# Altium PCB SMART_WATCH.PcbDoc (part 2 of 4)
Units mil, origin at the board's own origin, x right, y up, seen from the top; angles counter-clockwise.
Board outline 2401.57 x 2362.2 mil, 2 copper layers (Top Layer, Bottom Layer); 98 components, 64 nets, 344 pads, 272 vias.
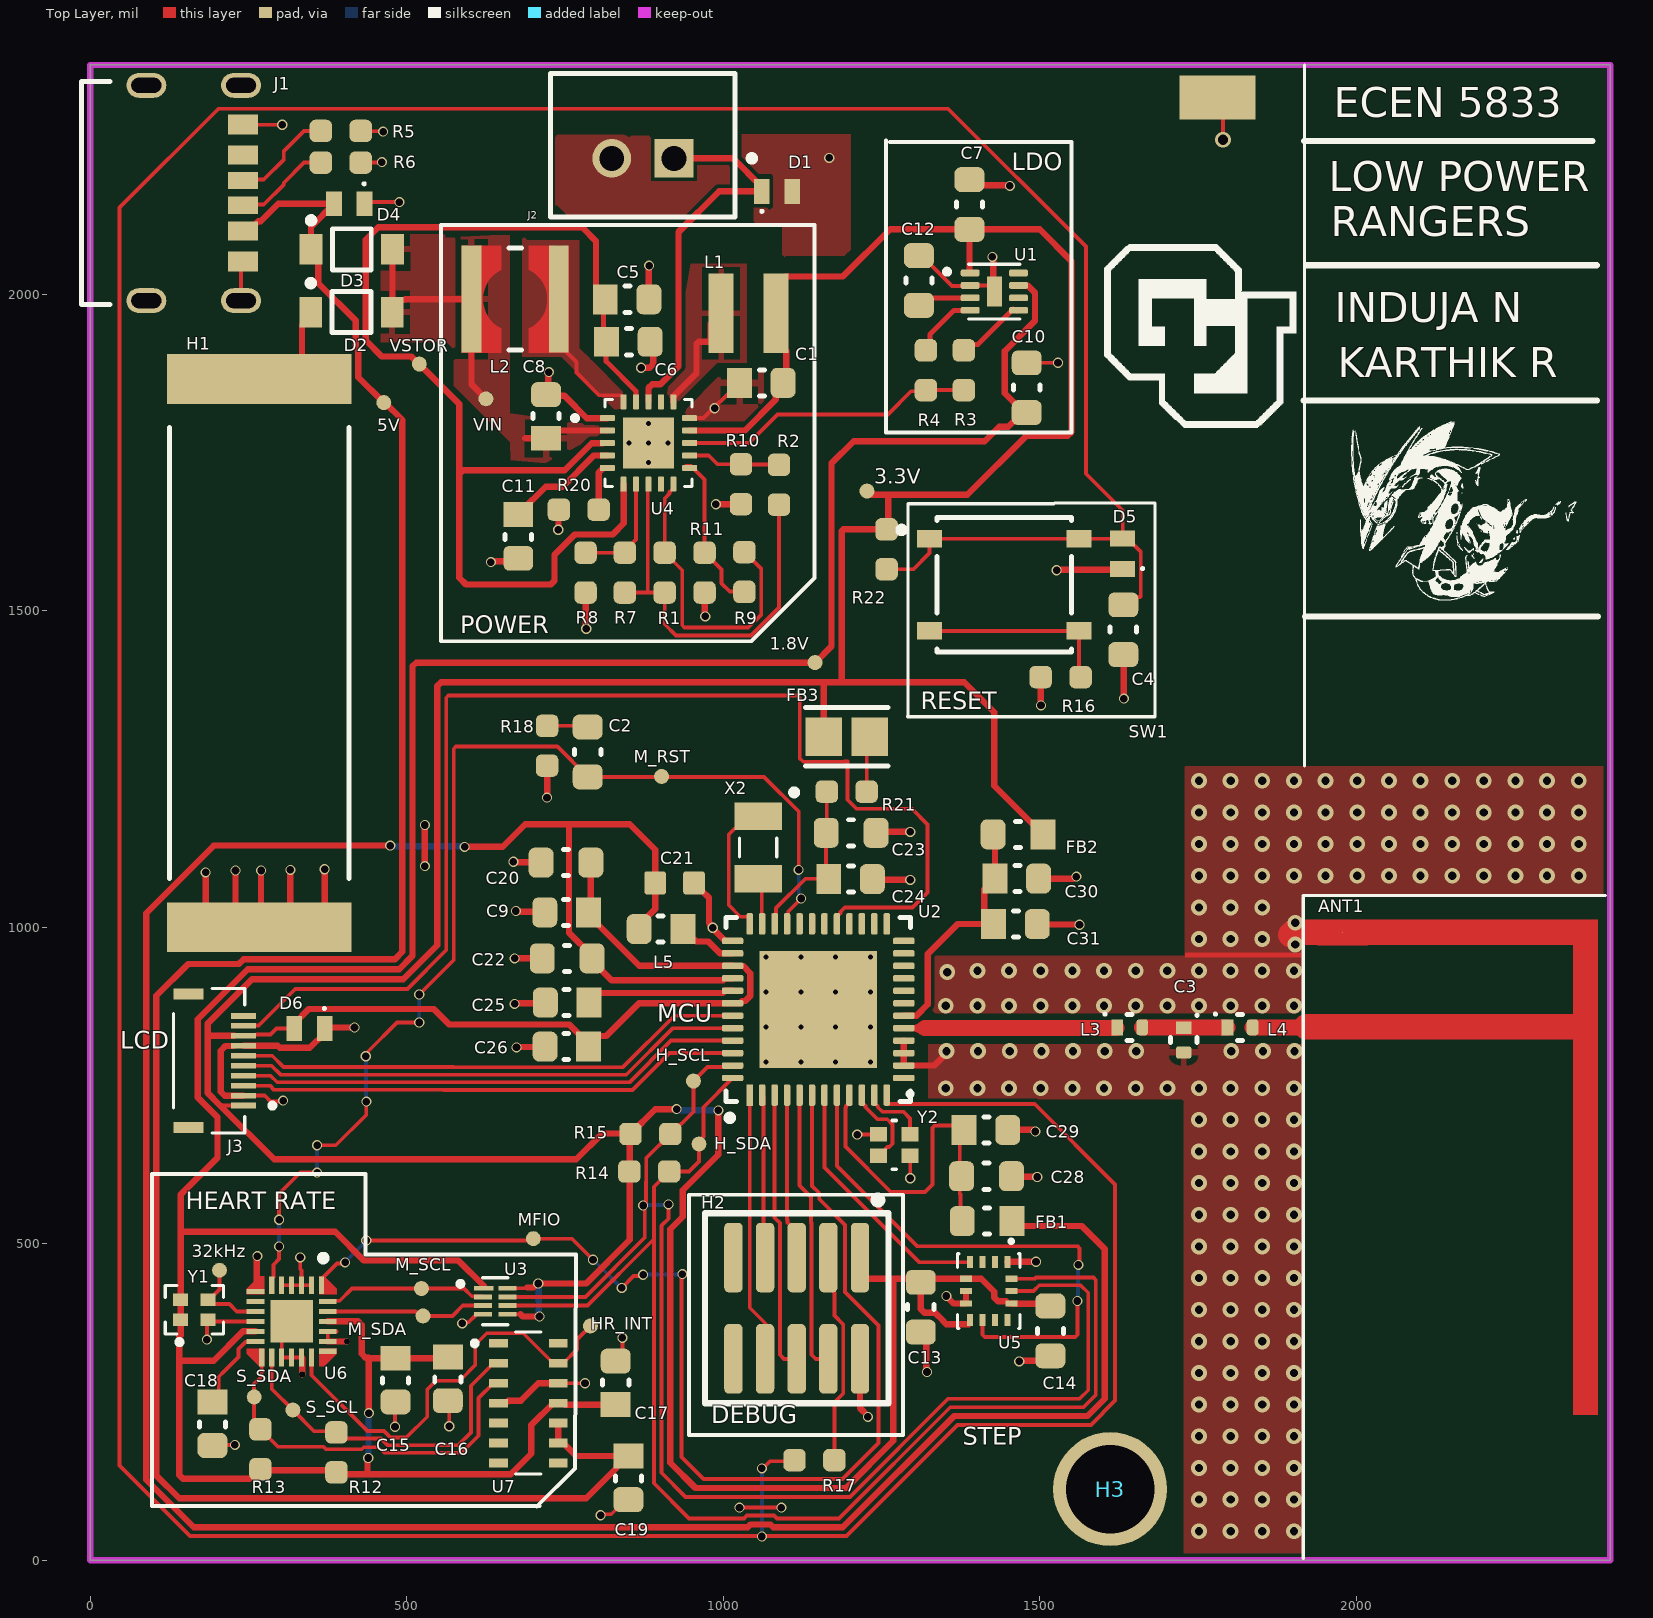
[diagram p0: Top Layer view]

## Part data (continued)
C21: library part "CAP 4.7uF 16V 0603", "4.7 ÂµF Â±10% 16V Ceramic Capacitor X5R 0603 (1608 Metric)", Package="SMD-2 Samsung", Supplier Part Number 1=1276-1784-1-ND, Check_prices=https://www.snapeda.com/parts/CL10A475KO8NNNC/Samsung/view-part/?ref=eda, MF="Samsung Electro-Mechanics", MP=CL10A475KO8NNNC, SnapEDA_Link=https://www.snapeda.com/parts/CL10A475KO8NNNC/Samsung/view-part/?ref=snap, Supplier 1=DigiKey
C28: "50V 100pF NP0 ±5% 0603 Multilayer Ceramic Capacitors MLCC - SMD/SMT ROHS", Case Code (Imperial)=0603, Dielectric=C0G, Dielectric Material=Ceramic, Insulation Resistance=100GΩ, Manufacturer="Yageo Group", Manufacturer Part Number=CC0603JRNPO9BN101, Max Operating Temperature=125°C, Min Operating Temperature=-55°C, Supplier Part Number 1=311-1069-1-ND, Temperature Coefficient=30ppm/°C, Tolerance=5%, Voltage=50V, Case/Package=0603, Category="Ceramic Capacitors", China RoHS=Compliant, ComponentLink1Description=https://datasheet.octopart.com:443/CC0603JRNPO9BN101-Yageo-datasheet-182140217.pdf?src-supplier=IHS, ComponentLink1URL=https://datasheet.octopart.com:443/CC0603JRNPO9BN101-Yageo-datasheet-182140217.pdf?src-supplier=IHS, ComponentLink2Description=https://datasheet.octopart.com:443/CC0603JRNPO9BN101-Yageo-datasheet-78855684.pdf?src-supplier=Upverter, ComponentLink2URL=https://datasheet.octopart.com:443/CC0603JRNPO9BN101-Yageo-datasheet-78855684.pdf?src-supplier=Upverter, ComponentLink3Description=https://datasheet.octopart.com:443/CC0603JRNPO9BN101-Yageo-datasheet-10406438.pdf?src-supplier=element14+APAC, ComponentLink3URL=https://datasheet.octopart.com:443/CC0603JRNPO9BN101-Yageo-datasheet-10406438.pdf?src-supplier=element14+APAC, ComponentLink4Description=https://datasheet.octopart.com:443/CC0603JRNPO9BN101-Yageo-datasheet-151948684.pdf?src-supplier=Newark, ComponentLink4URL=https://datasheet.octopart.com:443/CC0603JRNPO9BN101-Yageo-datasheet-151948684.pdf?src-supplier=Newark, ComponentLink5Description=https://datasheet.octopart.com:443/CC0603JRNPO9BN101-Yageo-datasheet-24578986.pdf?src-supplier=Newark, ComponentLink5URL=https://datasheet.octopart.com:443/CC0603JRNPO9BN101-Yageo-datasheet-24578986.pdf?src-supplier=Newark, ComponentLink6Description=https://datasheet.octopart.com:443/CC0603JRNPO9BN101-Phycomp-datasheet-504625.pdf?src-supplier=Newark, ComponentLink6URL=https://datasheet.octopart.com:443/CC0603JRNPO9BN101-Phycomp-datasheet-504625.pdf?src-supplier=Newark, ComponentLink7Description=https://datasheet.octopart.com:443/CC0603JRNPO9BN101-Yageo-datasheet-181968162.pdf?src-supplier=Newark, ComponentLink7URL=https://datasheet.octopart.com:443/CC0603JRNPO9BN101-Yageo-datasheet-181968162.pdf?src-supplier=Newark, ComponentLink8Description=https://datasheet.octopart.com:443/CC0603JRNPO9BN101-Yageo-datasheet-181968163.pdf?src-supplier=Newark, ComponentLink8URL=https://datasheet.octopart.com:443/CC0603JRNPO9BN101-Yageo-datasheet-181968163.pdf?src-supplier=Newark, ComponentLink9Description=https://datasheet.octopart.com:443/CC0603JRNPO9BN101-Yageo-datasheet-67645495.pdf?src-supplier=Newark, ComponentLink9URL=https://datasheet.octopart.com:443/CC0603JRNPO9BN101-Yageo-datasheet-67645495.pdf?src-supplier=Newark, ComponentLink10Description=https://datasheet.octopart.com:443/CC0603JRNPO9BN101-Phycomp-datasheet-5321569.pdf?src-supplier=element14, ComponentLink10URL=https://datasheet.octopart.com:443/CC0603JRNPO9BN101-Phycomp-datasheet-5321569.pdf?src-supplier=element14, ComponentLink11Description=https://datasheet.octopart.com:443/CC0603JRNPO9BN101-Yageo-datasheet-8817079.pdf?src-supplier=element14, ComponentLink11URL=https://datasheet.octopart.com:443/CC0603JRNPO9BN101-Yageo-datasheet-8817079.pdf?src-supplier=element14, ComponentLink12Description=https://datasheet.octopart.com:443/CC0603JRNPO9BN101-Yageo-datasheet-8324240.pdf?src-supplier=element14, ComponentLink12URL=https://datasheet.octopart.com:443/CC0603JRNPO9BN101-Yageo-datasheet-8324240.pdf?src-supplier=element14, ComponentLink13Description=https://datasheet.octopart.com:443/CC0603JRNPO9BN101-Yageo-datasheet-65873193.pdf?src-supplier=Farnell, ComponentLink13URL=https://datasheet.octopart.com:443/CC0603JRNPO9BN101-Yageo-datasheet-65873193.pdf?src-supplier=Farnell, ComponentLink14Description=https://datasheet.octopart.com:443/CC0603JRNPO9BN101-Yageo-datasheet-137875056.pdf?src-supplier=Future+Electronics, ComponentLink14URL=https://datasheet.octopart.com:443/CC0603JRNPO9BN101-Yageo-datasheet-137875056.pdf?src-supplier=Future+Electronics, ComponentLink15Description=https://datasheet.octopart.com:443/CC0603JRNPO9BN101-Yageo-datasheet-136957424.pdf?src-supplier=Future+Electronics, ComponentLink15URL=https://datasheet.octopart.com:443/CC0603JRNPO9BN101-Yageo-datasheet-136957424.pdf?src-supplier=Future+Electronics, ComponentLink16Description=https://datasheet.octopart.com:443/CC0603JRNPO9BN101-Yageo-datasheet-137700082.pdf?src-supplier=Future+Electronics, ComponentLink16URL=https://datasheet.octopart.com:443/CC0603JRNPO9BN101-Yageo-datasheet-137700082.pdf?src-supplier=Future+Electronics, ComponentLink17Description=https://datasheet.octopart.com:443/CC0603JRNPO9BN101-Yageo-datasheet-62091628.pdf?src-supplier=Future+Electronics, ComponentLink17URL=https://datasheet.octopart.com:443/CC0603JRNPO9BN101-Yageo-datasheet-62091628.pdf?src-supplier=Future+Electronics, ComponentLink18Description=https://datasheet.octopart.com:443/CC0603JRNPO9BN101-Yageo-datasheet-16730043.pdf?src-supplier=Future+Electronics, ComponentLink18URL=https://datasheet.octopart.com:443/CC0603JRNPO9BN101-Yageo-datasheet-16730043.pdf?src-supplier=Future+Electronics, ComponentLink19Description=https://datasheet.octopart.com:443/CC0603JRNPO9BN101-Yageo-datasheet-15895757.pdf?src-supplier=Future+Electronics, ComponentLink19URL=https://datasheet.octopart.com:443/CC0603JRNPO9BN101-Yageo-datasheet-15895757.pdf?src-supplier=Future+Electronics, ComponentLink20Description=https://datasheet.octopart.com:443/CC0603JRNPO9BN101-Yageo-datasheet-12589826.pdf?src-supplier=Future+Electronics, ComponentLink20URL=https://datasheet.octopart.com:443/CC0603JRNPO9BN101-Yageo-datasheet-12589826.pdf?src-supplier=Future+Electronics, ComponentLink21Description=https://datasheet.octopart.com:443/CC0603JRNPO9BN101-Yageo-datasheet-8555986.pdf?src-supplier=TME, ComponentLink21URL=https://datasheet.octopart.com:443/CC0603JRNPO9BN101-Yageo-datasheet-8555986.pdf?src-supplier=TME, ComponentLink22Description=https://datasheet.octopart.com:443/CC0603JRNPO9BN101-Yageo-datasheet-8643175.pdf?src-supplier=SOS+electronic, ComponentLink22URL=https://datasheet.octopart.com:443/CC0603JRNPO9BN101-Yageo-datasheet-8643175.pdf?src-supplier=SOS+electronic, ComponentLink23Description=https://datasheet.octopart.com:443/CC0603JRNPO9BN101-Yageo-datasheet-68296204.pdf?src-supplier=Megastar, ComponentLink23URL=https://datasheet.octopart.com:443/CC0603JRNPO9BN101-Yageo-datasheet-68296204.pdf?src-supplier=Megastar, ComponentLink24Description=http://sigma.octopart.com:80/rohs_statement/Yageo-company-2.pdf?src-supplier=Compliance+Statements, ComponentLink24URL=http://sigma.octopart.com:80/rohs_statement/Yageo-company-2.pdf?src-supplier=Compliance+Statements, ComponentLink25Description=http://sigma.octopart.com:80/conflict_mineral_statement/Yageo-company-3.pdf?src-supplier=Compliance+Statements, ComponentLink25URL=http://sigma.octopart.com:80/conflict_mineral_statement/Yageo-company-3.pdf?src-supplier=Compliance+Statements, Composition=Ceramic, Depth=800µm, Halogen Free="Halogen Free", Height=800µm, Lead Free="Lead Free", Length=1.6mm, Lifecycle Status=Production, Mounting Technology="Surface Mount", Number of Terminals=2, Pins=2, Pricing="4000=0.0038, 8000=0.00371, 16000=0.00364, 24000=0.00357, 32000=0.00351 (USD)", Radiation Hardening=No, REACH SVHC=Yes, RoHS=Compliant, Schedule B="8532240020, 8532240020|8532240020|8532240020|8532240020|8532240020|8532240020|8532240020|8532240020|8532240020|8532240020|8532240020|8532240020|8532240020|8532240020|8532240020|8532240020|8532240020|8532240020|8532240020|8532240020|8532240020|8532240020|8532240020|85", Stock=1204000, Supplier=Avnet, Supplier 1=DigiKey, Supplier Part Number=CC0603JRNPO9BN101, Termination=SMD/SMT, Thickness=889µm, Voltage Rating=50V, Voltage Rating (AC)=50V, Voltage Rating (DC)=50V, Width=800µm
C29 C31: "Ceramic Capacitor, Multilayer, Ceramic, 100V, 5% +Tol, 5% -Tol, C0G, 30ppm/Cel TC, 0.00001uF, Surface Mount, 0603", Capacitor Type=Ceramic, Case/Package=0402, Manufacturer=Murata, Manufacturer Part Number=GRM1555C1H100FA01D, Max Operating Temperature=125°C, Min Operating Temperature=-55°C, Package Shape=Rectangular, Package Style=SMTMeter, Rated DC Voltage (URdc)=50V, Supplier Part Number=490-6186-1-ND, Temperature Characteristics Code=C0G, Tolerance  (fill in as +-)=1%, Category="Ceramic Capacitors", ComponentLink1Description=https://datasheet.ciiva.com:443/pdfs/VipMasterIC/IC/MURE/MURE-S-A0004347008/MURE-S-A0004347294-1.pdf?src-supplier=IHS+Markit, ComponentLink1URL=https://datasheet.ciiva.com:443/pdfs/VipMasterIC/IC/MURE/MURE-S-A0004347008/MURE-S-A0004347294-1.pdf?src-supplier=IHS+Markit, ComponentLink2Description=https://datasheet.ciiva.com/6263/partnumbering-e-01-6263819.pdf?src-supplier=Digikey, ComponentLink2URL=https://datasheet.ciiva.com/6263/partnumbering-e-01-6263819.pdf?src-supplier=Digikey, ComponentLink3Description=https://datasheet.ciiva.com/6263/partnumbering-e-01-6263822.pdf?src-supplier=Digikey, ComponentLink3URL=https://datasheet.ciiva.com/6263/partnumbering-e-01-6263822.pdf?src-supplier=Digikey, ComponentLink4Description=https://datasheet.ciiva.com:443/pdfs/VipMasterIC/IC/MURE/MURE-S-A0004365318/MURE-S-A0004370306-1.pdf?src-supplier=IHS+Markit, ComponentLink4URL=https://datasheet.ciiva.com:443/pdfs/VipMasterIC/IC/MURE/MURE-S-A0004365318/MURE-S-A0004370306-1.pdf?src-supplier=IHS+Markit, ComponentLink5Description=https://datasheet.ciiva.com/133/product-133480.pdf?src-supplier=Digikey, ComponentLink5URL=https://datasheet.ciiva.com/133/product-133480.pdf?src-supplier=Digikey, ComponentLink6Description=https://datasheet.ciiva.com/133/product-133481.pdf?src-supplier=Digikey, ComponentLink6URL=https://datasheet.ciiva.com/133/product-133481.pdf?src-supplier=Digikey, ComponentLink7Description=https://datasheet.ciiva.com/133/product-133482.pdf?src-supplier=Digikey, ComponentLink7URL=https://datasheet.ciiva.com/133/product-133482.pdf?src-supplier=Digikey, ComponentLink8Description=https://datasheet.ciiva.com/18183/getdatasheetpartid-307287-18183583.pdf?src-supplier=Verical, ComponentLink8URL=https://datasheet.ciiva.com/18183/getdatasheetpartid-307287-18183583.pdf?src-supplier=Verical, ComponentLink9Description=https://datasheet.ciiva.com/11607/product-11607353.pdf?src-supplier=Avnet, ComponentLink9URL=https://datasheet.ciiva.com/11607/product-11607353.pdf?src-supplier=Avnet, Dielectric Material=Ceramic, Height=0.9mm, JESD-609 Code=e3, Length=1.6mm, Mounting Technology="Surface Mount", Multilayer=Yes, Packaging="Tape and Reel", Pins=2, Pricing="1=0.1, 10=0.03, 50=0.0204, 100=0.0174, 500=0.0125, 1000=0.01097, 2500=0.00936, 5000=0.00838 (USD)", Reach SVHC Compliant=Yes, Reference Standard=AEC-Q200, RoHS=Yes, RoHS Compliant=Yes, Stock=4693307, Supplier=Digikey, Supplier 1=DigiKey, Supplier Part Number 1=490-6186-1-ND, Terminal Finish=Nickel, Termination=Wraparound, Tolerance (fill in as +-)=1%, Width=0.8mm
C30: "0603 0.22 uF 10 V ±10% Tolerance X7R SMT Multilayer Ceramic Capacitor", Case Code (Imperial)=0603, Case Code (Metric)=1608, Dielectric=X7R, Dielectric Material=Ceramic, Manufacturer=Murata, Manufacturer Lifecycle Status=NRND, Manufacturer Part Number=GRM188R71A224KA01J, Max Operating Temperature=125°C, Min Operating Temperature=-55°C, Tolerance=10%, Voltage Rating=10V, Case/Package=0603, Category="Ceramic Capacitors", ComponentLink1Description=https://datasheet.octopart.com:443/GRM188R71A224KA01J-Murata-datasheet-14401092.pdf?src-supplier=Future+Electronics, ComponentLink1URL=https://datasheet.octopart.com:443/GRM188R71A224KA01J-Murata-datasheet-14401092.pdf?src-supplier=Future+Electronics, ComponentLink2Description=https://datasheet.octopart.com:443/GRM188R71A224KA01J-Murata-datasheet-22122223.pdf?src-supplier=Future+Electronics, ComponentLink2URL=https://datasheet.octopart.com:443/GRM188R71A224KA01J-Murata-datasheet-22122223.pdf?src-supplier=Future+Electronics, ComponentLink3Description=https://datasheet.octopart.com:443/GRM188R71A224KA01J-Murata-datasheet-11801259.pdf?src-supplier=Future+Electronics, ComponentLink3URL=https://datasheet.octopart.com:443/GRM188R71A224KA01J-Murata-datasheet-11801259.pdf?src-supplier=Future+Electronics, ComponentLink4Description=https://datasheet.octopart.com:443/GRM188R71A224KA01J-Murata-datasheet-8330557.pdf?src-supplier=Future+Electronics, ComponentLink4URL=https://datasheet.octopart.com:443/GRM188R71A224KA01J-Murata-datasheet-8330557.pdf?src-supplier=Future+Electronics, ComponentLink5Description=https://datasheet.octopart.com:443/GRM188R71A224KA01J-Murata-datasheet-44107669.pdf?src-supplier=Future+Electronics, ComponentLink5URL=https://datasheet.octopart.com:443/GRM188R71A224KA01J-Murata-datasheet-44107669.pdf?src-supplier=Future+Electronics, ComponentLink6Description=https://datasheet.octopart.com:443/GRM188R71A224KA01J-Murata-datasheet-141274968.pdf?src-supplier=Ciiva, ComponentLink6URL=https://datasheet.octopart.com:443/GRM188R71A224KA01J-Murata-datasheet-141274968.pdf?src-supplier=Ciiva, ComponentLink7Description=https://datasheet.octopart.com:443/GRM188R71A224KA01J-Murata-datasheet-140705377.pdf?src-supplier=Ciiva, ComponentLink7URL=https://datasheet.octopart.com:443/GRM188R71A224KA01J-Murata-datasheet-140705377.pdf?src-supplier=Ciiva, ComponentLink8Description=https://datasheet.octopart.com:443/GRM188R71A224KA01J-Murata-datasheet-138742946.pdf?src-supplier=Ciiva, ComponentLink8URL=https://datasheet.octopart.com:443/GRM188R71A224KA01J-Murata-datasheet-138742946.pdf?src-supplier=Ciiva, ComponentLink9Description=https://datasheet.octopart.com/GRM188R71A224KA01J-Murata-datasheet-12515295.pdf, ComponentLink9URL=https://datasheet.octopart.com/GRM188R71A224KA01J-Murata-datasheet-12515295.pdf, ComponentLink10Description=https://datasheet.octopart.com/GRM188R71A224KA01J-Murata-datasheet-12510076.pdf, ComponentLink10URL=https://datasheet.octopart.com/GRM188R71A224KA01J-Murata-datasheet-12510076.pdf, ComponentLink11Description=https://datasheet.octopart.com/GRM188R71A224KA01J-Murata-datasheet-11978611.pdf, ComponentLink11URL=https://datasheet.octopart.com/GRM188R71A224KA01J-Murata-datasheet-11978611.pdf, ComponentLink12Description=https://datasheet.octopart.com/GRM188R71A224KA01J-Murata-datasheet-10025737.pdf, ComponentLink12URL=https://datasheet.octopart.com/GRM188R71A224KA01J-Murata-datasheet-10025737.pdf, ComponentLink13Description=https://datasheet.octopart.com/GRM188R71A224KA01J-Murata-datasheet-8819587.pdf, ComponentLink13URL=https://datasheet.octopart.com/GRM188R71A224KA01J-Murata-datasheet-8819587.pdf, ComponentLink14Description=http://sigma.octopart.com:80/reach_statement/Murata-company-16.pdf?src-supplier=Compliance+Statements, ComponentLink14URL=http://sigma.octopart.com:80/reach_statement/Murata-company-16.pdf?src-supplier=Compliance+Statements, Depth=800µm, Height=800µm, Lead Free="Lead Free", Length=1.6mm, Lifecycle Status=NRND, Material=Ceramic, Mounting Technology="Surface Mount", Number of Terminals=2, Pricing="1=0.0224, 10=0.022, 1000=0.022, 30000=0.022 (USD)", Radiation Hardening=No, REACH SVHC=Yes, RoHS=Compliant, Schedule B="8532240020, 8532240020|8532240020, 8532240020|8532240020|8532240020, 8532240020|8532240020|8532240020|8532240020", Stock=100000, Supplier="Arrow Electronics", Supplier Part Number=GRM188R71A224KA01J, Termination=SMD/SMT, Thickness=800µm, Voltage Rating (DC)=10V, Width=800µm
D1 D4 D5 D6: library part "TVS Diode ESD Protection", "824032815 Tvs Diode, Bidir, 5V, Dfn1610 Rohs Compliant: Yes", Max Operating Temperature=85°C, Min Operating Temperature=-55°C, Supplier Part Number 1=732-824032815CT-ND, Height=500µm, Length=1.6mm, NexarPartId=133963841, RoHS=Compliant, Supplier 1=DigiKey, Width=1mm
D2 D3: library part "Diode Schottky", "Schottky Power Rectifier, 2-Pin SOD-123, Pb-Free, Tape and Reel", Manufacturer="On Semiconductor", Supplier Part Number 1=MBR120VLSFT1GOSTR-ND, ComponentLink1Description="Manufacturer URL", ComponentLink1URL=http://www.onsemi.com/, ComponentLink2Description=Datasheet, ComponentLink2URL=http://www.onsemi.cn/pub_link/Collateral/MBR120VLSFT1-D.PDF, ComponentLink3Description="Package Specification", ComponentLink3URL=http://www.onsemi.cn/pub_link/Collateral/MBR120VLSFT1-D.PDF, Configuration=Single, DatasheetVersion="Rev. 2", IFSM Max (A)=45, Mounting Technology="Surface Mount", PackageDescription="2-Pin SOD, Body 1.65 x 2.7 mm", PackageReference=SOD-123FL-2-498-01, PackageVersion="Rev. A", Packing="Tape and Reel", PartNumber=MBR120VLSFT1G, RoHS=TRUE, Supplier 1=DigiKey
FB1: library part "600R Ferrite bead", "Chip Ferrite Bead, 0603, 600Ω @ 100MHz, 0.38Ω, 25%, 500mA CMP-06046-002436-1", Case Code (Imperial)=0603, Case Code (Metric)=1608, DC Resistance (DCR)=380mR, Max Current Rating=500mA, Max Operating Temperature=125°C, Min Operating Temperature=-55°C, Supplier Part Number 1=490-14396-6-ND, Case/Package=0603, Mount="Surface Mount", Number of Lines=1, Packaging="Cut Tape", RoHS Compliant=Yes, Supplier 1=DigiKey
FB2: library part "600R Ferrite bead", "Chip Ferrite Bead, 0603, 600Ω @ 100MHz, 0.38Ω, 25%, 500mA CMP-06046-002436-1", Case Code (Imperial)=0603, Case Code (Metric)=1608, DC Resistance (DCR)=380mR, Max Current Rating=500mA, Max Operating Temperature=125°C, Min Operating Temperature=-55°C, Supplier Part Number 1=490-14396-1-ND, Case/Package=0603, Mount="Surface Mount", Number of Lines=1, Packaging="Cut Tape", RoHS Compliant=Yes, Supplier 1=DigiKey
FB3: "Ferrite Beads Multi-Layer 1KOhm 25% 100MHz 250mA 400mOhm DCR 0805 T/R", Case Code (Imperial)=0805, Case Code (Metric)=2012, Clock Frequency=100MHz, Current Rating=200mA, DC Resistance (DCR)=400mΩ, Manufacturer=Murata, Max Current Rating=250mA, Max Operating Temperature=125°C, Min Operating Temperature=-55°C, Supplier Part Number=73M9146, Tolerance=25%, Case/Package=0805, Category="Ferrite Beads and Chips", ComponentLink1Description=https://datasheet.octopart.com:443/BLM21BD102SN1D-Murata-datasheet-12522583.pdf?src-supplier=Upverter, ComponentLink1URL=https://datasheet.octopart.com:443/BLM21BD102SN1D-Murata-datasheet-12522583.pdf?src-supplier=Upverter, ComponentLink2Description=https://datasheet.octopart.com:443/BLM21BD102SN1D-Murata-datasheet-10083551.pdf?src-supplier=Upverter, ComponentLink2URL=https://datasheet.octopart.com:443/BLM21BD102SN1D-Murata-datasheet-10083551.pdf?src-supplier=Upverter, ComponentLink3Description=https://datasheet.octopart.com:443/BLM21BD102SN1D-Murata-datasheet-8508678.pdf?src-supplier=Upverter, ComponentLink3URL=https://datasheet.octopart.com:443/BLM21BD102SN1D-Murata-datasheet-8508678.pdf?src-supplier=Upverter, ComponentLink4Description=https://datasheet.octopart.com:443/BLM21BD102SN1D-Murata-datasheet-166171482.pdf?src-supplier=IHS, ComponentLink4URL=https://datasheet.octopart.com:443/BLM21BD102SN1D-Murata-datasheet-166171482.pdf?src-supplier=IHS, ComponentLink5Description=https://datasheet.octopart.com:443/BLM21BD102SN1D-Murata-datasheet-13283.pdf?src-supplier=element14+APAC, ComponentLink5URL=https://datasheet.octopart.com:443/BLM21BD102SN1D-Murata-datasheet-13283.pdf?src-supplier=element14+APAC, ComponentLink6Description=https://datasheet.octopart.com:443/BLM21BD102SN1D-Murata-datasheet-11600838.pdf?src-supplier=_legacy+Avnet, ComponentLink6URL=https://datasheet.octopart.com:443/BLM21BD102SN1D-Murata-datasheet-11600838.pdf?src-supplier=_legacy+Avnet, ComponentLink7Description=https://datasheet.octopart.com:443/BLM21BD102SN1D-Murata-datasheet-5333885.pdf?src-supplier=_legacy+Avnet, ComponentLink7URL=https://datasheet.octopart.com:443/BLM21BD102SN1D-Murata-datasheet-5333885.pdf?src-supplier=_legacy+Avnet, ComponentLink8Description=https://datasheet.octopart.com:443/BLM21BD102SN1D-Murata-datasheet-141258105.pdf?src-supplier=Ciiva, ComponentLink8URL=https://datasheet.octopart.com:443/BLM21BD102SN1D-Murata-datasheet-141258105.pdf?src-supplier=Ciiva, ComponentLink9Description=https://datasheet.octopart.com:443/BLM21BD102SN1D-Murata-datasheet-138707338.pdf?src-supplier=Ciiva, ComponentLink9URL=https://datasheet.octopart.com:443/BLM21BD102SN1D-Murata-datasheet-138707338.pdf?src-supplier=Ciiva, ComponentLink10Description=https://datasheet.octopart.com:443/BLM21BD102SN1D-Murata-datasheet-155323212.pdf?src-supplier=TME, ComponentLink10URL=https://datasheet.octopart.com:443/BLM21BD102SN1D-Murata-datasheet-155323212.pdf?src-supplier=TME, ComponentLink11Description=https://datasheet.octopart.com:443/BLM21BD102SN1D-Murata-datasheet-22147371.pdf?src-supplier=TME, ComponentLink11URL=https://datasheet.octopart.com:443/BLM21BD102SN1D-Murata-datasheet-22147371.pdf?src-supplier=TME, ComponentLink12Description=https://datasheet.octopart.com:443/BLM21BD102SN1D-Murata-datasheet-62086368.pdf?src-supplier=Future+Electronics, ComponentLink12URL=https://datasheet.octopart.com:443/BLM21BD102SN1D-Murata-datasheet-62086368.pdf?src-supplier=Future+Electronics, ComponentLink13Description=https://datasheet.octopart.com/BLM21BD102SN1D-Murata-datasheet-37129980.pdf, ComponentLink13URL=https://datasheet.octopart.com/BLM21BD102SN1D-Murata-datasheet-37129980.pdf, ComponentLink14Description=https://datasheet.octopart.com:443/BLM21BD102SN1D-Murata-datasheet-80921.pdf?src-supplier=RS+(Formerly+Allied+Electronics), ComponentLink14URL=https://datasheet.octopart.com:443/BLM21BD102SN1D-Murata-datasheet-80921.pdf?src-supplier=RS+(Formerly+Allied+Electronics), ComponentLink15Description=http://sigma.octopart.com:80/reach_statement/Murata-company-16.pdf?src-supplier=Compliance+Statements, ComponentLink15URL=http://sigma.octopart.com:80/reach_statement/Murata-company-16.pdf?src-supplier=Compliance+Statements, Core Material=Ferrite, DC Current=200mA, Depth=1.25mm, ESR=400mΩ, Frequency=100MHz, Height=850µm, Impedance=1kΩ, Lead Free="Lead Free", Length=2mm, Lifecycle Status=Production, Manufacturer Part Number=BLM21BD102SN1D, Material=Steel, Max DC Current=200mA, Military Standard=Not, Number of Circuits=1, Number of Lines=1, Number of Terminals=2, Packaging="Tape and Reel", Pins=2, Pricing="10=0.119, 25=0.105, 50=0.095, 100=0.086, 250=0.075, 500=0.067, 1000=0.054 (USD)", Radiation Hardening=No, REACH SVHC=Yes, RMS Current (Irms)=250mA, RoHS=Compliant, Schedule B="8504500000, 8504500000|8504500000|8504500000|8504500000|8504500000", Shielding=Unshielded, Stock=7170, Supplier=Newark, Termination=SMD/SMT, Test Frequency=100MHz, Weight=5.499807mg, Width=1.25mm
H1: library part SOLAR_CELL, "MONOCRYS SOLAR CELL 30.7MW 690MV", Color=Black, Manufacturer=Sullins, Manufacturer Part Number=PRPC002SAAN-RC, Standard Package=1, Supplier Part Number 1=KXOB25-14X1FCT-ND, Category="Connectors, Interconnects", ComponentLink1Description=https://media.digikey.com/PDF/Data%20Sheets/Sullins%20PDFs/xRxCzzzSxxN-RC_ST_11635-B.pdf?src-supplier=Digi-Key, ComponentLink1URL=https://media.digikey.com/PDF/Data%20Sheets/Sullins%20PDFs/xRxCzzzSxxN-RC_ST_11635-B.pdf?src-supplier=Digi-Key, Connector Type="Header, Unshrouded, Breakaway", Contact Finish=Gold, Contact Finish Thickness=Flash, Contact Mating Length="0.230\" (5.84mm)", Contact Type="Male Pin", Family="Rectangular Connectors - Headers, Male Pins", Fastening Type=-, Features=-, Mounting Type="Through Hole", Number of Positions=2, Number of Positions Loaded=All, Number of Rows=1, Online Catalog="0.100\" (2.54mm) Pitch Connector Headers", Other Names="S9510E-02  S9510E-02-ND", Packaging=Bulk, Pitch="0.100\" (2.54mm)", Pricing 1="1=0.08, 10=0.073, 25=0.054, 50=0.0464, 100=0.0449, 250=0.0387, 500=0.0372 (USD)", Row Spacing=-, Series=-, Stock 1=42739, Supplier 1=DigiKey, Termination=Solder
H2: library part "Debug Connector Mini SWD - 0.05\"", "Mini SWD 0.05\" Pitch Connector - 10 Pin SMT Box Header", Manufacturer="Adafruit Industries", Manufacturer Part Number=4048, Category=Connectors, ComponentLink1Description=https://media.digikey.com/pdf/Data%20Sheets/Adafruit%20PDFs/4048_Web.pdf?src-supplier=Digi-Key, ComponentLink1URL=https://media.digikey.com/pdf/Data%20Sheets/Adafruit%20PDFs/4048_Web.pdf?src-supplier=Digi-Key, Pricing 1="1=1.95000 (USD)", RoHS=No, Stock 1=201, Supplier 1=Digi-Key
H3: library part "PAD HOLE"
J1: library part "USB-C Power Connector", "USB-C (USB TYPE-C) Receptacle Connector 24 (6+18 Dummy) Position Surface Mount, Right Angle; Through Hole", Manufacturer Part Number=USB4125-GF-A_REVA2, Package=None, Supplier Part Number 1=2073-USB4125-GF-A-0190DKR-ND, Availability=Unavailable, Price=None, Supplier 1=DigiKey
J2: library part CMP-2000-05888-3, "CONN HEADER VERT 2POS 2.5MM", Color=Natural, Contact Resistance=20mR, Current Rating=3A, Housing Color=White, Insulation Resistance=1GR, Max Operating Temperature=85°C, Max Voltage Rating (AC)=250V, Min Operating Temperature=-25°C, Supplier Part Number 1=306-B2BXHALFSNP, Connector Type="Male Pin", Contact Material=Brass, Contact Plating=Tin, Contact Type="Male Pin", Depth=5.75mm, Fastening Type=Detent, Housing Material=Polyamide, Lead Free="Lead Free", Lead Pitch=2.5mm, Length=7.4mm, Max Current Rating=3A, Max Voltage Rating (DC)=250V, Mount="Through Hole", Number of Contacts=2, Number of Positions=2, Number of Rows=1, Orientation=Straight, Packaging=Bulk, Pitch=2.5mm, REACH SVHC="No SVHC", Series=XH, Supplier 1=Mouser, Termination=Solder, Voltage Rating=250V, Voltage Rating (AC)=250V, Wire/Cable Gauge=22AWG
J3: library part TF13BA-10S-0.4SH(800), Package=None, Availability=Unavailable, MP=TF13BA-10S-0.4SH(800), Price=None
L1: library part CMP-0227-00077-3, "10 µH Shielded Drum Core, Wirewound Inductor 650 mA 470mOhm Max Nonstandard", Ambient Temperature Range High=85°C, Ambient Temperature Range Low=-40°C, Case/Package=Nonstandard, Current Rating=650mA, DC Resistance (DCR)=390mΩ, Inductance=10µH, Inductance Tolerance=30%, Max DC Current=800mA, Max Operating Temperature=125°C, Saturation Current=500mA, Self Resonant Frequency=40MHz, Series Resistance=300mΩ, Supplier Part Number 1=08P2467, Test Frequency=100kHz, Composition=Wirewound, Core Material=Ferrite, Depth=2.8mm, Height=1.35mm, Height - Seated (Max)=1.4986mm, Lead Free="Lead Free", Length=2.78mm, Min Operating Temperature=-40°C, Mount="Surface Mount", NexarPartId=8917062, Number of Pins=2, Packaging="Cut Tape (CT)", REACH SVHC=Unknown, Resistance=390mΩ, RMS Current (Irms)=650mA, RoHS=Compliant, Shielding=Shielded, Supplier 1=Newark, Termination=SMD/SMT, Tolerance=30%, Weight=32.006612mg, Width=2.78mm
L2: library part CMP-0227-00346-4, "22 µH Shielded Drum Core, Wirewound Inductor 510 mA 450mOhm Max Nonstandard", Ambient Temperature Range High=95°C, Ambient Temperature Range Low=-40°C, Current Rating=510mA, DC Resistance (DCR)=410mΩ, Inductance=22µH, Inductance Tolerance=30%, Max Operating Temperature=125°C, Saturation Current=360mA, Self Resonant Frequency=26MHz, Series Resistance=450mΩ, Supplier Part Number 1=732-1012-6-ND, Test Frequency=100kHz, Composition=Wirewound, Core Material=Ferrite, Height=1.65mm, Length=3.8mm, Min Operating Temperature=-40°C, NexarPartId=22866169, Number of Pins=2, Packaging="Tape & Reel (TR)", RMS Current (Irms)=510mA, RoHS=Compliant, Supplier 1=DigiKey, Tolerance=30%, Width=3.8mm
L3 L4: "Inductor, 1.9Nh, 8Ghz, 0402 Rohs Compliant: Yes", Case/Package=0402, Current Rating=1A, DC Resistance (DCR)=50mΩ, Manufacturer=Murata, Manufacturer Lifecycle Status="IN PRODUCTION", Manufacturer Part Number=LQG15WZ1N9S02D, Max Operating Temperature=125°C, Min Operating Temperature=-55°C, Self Resonant Frequency=8GHz, Supplier Part Number=24AJ0906, Supplier Part Number 1=490-LQG15WZ1N9S02DCT-ND, Test Frequency=250MHz, Tolerance=15.79%, Category="Fixed Inductors", ComponentLink1Description=https://datasheet.octopart.com:443/LQG15WZ1N9S02D-Murata-datasheet-150573551.pdf?src-supplier=Newark, ComponentLink1URL=https://datasheet.octopart.com:443/LQG15WZ1N9S02D-Murata-datasheet-150573551.pdf?src-supplier=Newark, ComponentLink2Description=https://datasheet.octopart.com:443/LQG15WZ1N9S02D-Murata-datasheet-141286638.pdf?src-supplier=Ciiva, ComponentLink2URL=https://datasheet.octopart.com:443/LQG15WZ1N9S02D-Murata-datasheet-141286638.pdf?src-supplier=Ciiva, ComponentLink3Description=https://datasheet.octopart.com:443/LQG15WZ1N9S02D-Murata-datasheet-140712736.pdf?src-supplier=Ciiva, ComponentLink3URL=https://datasheet.octopart.com:443/LQG15WZ1N9S02D-Murata-datasheet-140712736.pdf?src-supplier=Ciiva, ComponentLink4Description=https://datasheet.octopart.com:443/LQG15WZ1N9S02D-Murata-datasheet-138753858.pdf?src-supplier=Ciiva, ComponentLink4URL=https://datasheet.octopart.com:443/LQG15WZ1N9S02D-Murata-datasheet-138753858.pdf?src-supplier=Ciiva, ComponentLink5Description=https://datasheet.octopart.com:443/LQG15WZ1N9S02D-Murata-datasheet-145449678.pdf?src-supplier=Geoflip, ComponentLink5URL=https://datasheet.octopart.com:443/LQG15WZ1N9S02D-Murata-datasheet-145449678.pdf?src-supplier=Geoflip, ComponentLink6Description=http://sigma.octopart.com:80/reach_statement/Murata-company-16.pdf?src-supplier=Compliance+Statements, ComponentLink6URL=http://sigma.octopart.com:80/reach_statement/Murata-company-16.pdf?src-supplier=Compliance+Statements, Core Material=Air, ESR=50mΩ, Height=500µm, Lifecycle Status=Production, Max Current Rating=1A, Number of Circuits=1, Number of Terminals=2, Pricing="10=0.078, 25=0.069, 50=0.067, 100=0.065, 250=0.057, 500=0.056, 1000=0.054 (USD)", Q Factor=23, REACH SVHC=Yes, RMS Current (Irms)=1A, RoHS=Compliant, Shielding=No, Stock=3275, Supplier=Newark, Supplier 1=DigiKey, Width=600µm
L5: library part "IND 4.7uH", "Inductor Power Shielded Multi-Layer 4.7uH 20% 2MHz Ferrite 0.12A 0.65Ohm DCR 0603 T/R", Case Code (Imperial)=0603, Case Code (Metric)=1608, Current Rating=350mA, DC Resistance (DCR)=650mΩ, Manufacturer=TDK, Manufacturer Lifecycle Status=PRODUCTION, Manufacturer Part Number=MLZ1608M4R7WT000, Max Operating Temperature=125°C, Min Operating Temperature=-55°C, Saturation Current=120mA, Self Resonant Frequency=80MHz, Supplier Part Number=46W4780, Supplier Part Number 1=445-6390-1-ND, Test Frequency=2MHz, Tolerance=20%, Case/Package=0603, Category="Fixed Inductors", ComponentLink1Description=https://datasheet.octopart.com:443/MLZ1608M4R7WT000-TDK-datasheet-155327068.pdf?src-supplier=ODG+(Origin+Data+Global), ComponentLink1URL=https://datasheet.octopart.com:443/MLZ1608M4R7WT000-TDK-datasheet-155327068.pdf?src-supplier=ODG+(Origin+Data+Global), ComponentLink2Description=https://datasheet.octopart.com:443/MLZ1608M4R7WT000-TDK-datasheet-170576133.pdf?src-supplier=Newark, ComponentLink2URL=https://datasheet.octopart.com:443/MLZ1608M4R7WT000-TDK-datasheet-170576133.pdf?src-supplier=Newark, ComponentLink3Description=https://datasheet.octopart.com:443/MLZ1608M4R7WT000-TDK-datasheet-12356712.pdf?src-supplier=Newark, ComponentLink3URL=https://datasheet.octopart.com:443/MLZ1608M4R7WT000-TDK-datasheet-12356712.pdf?src-supplier=Newark, ComponentLink4Description=https://datasheet.octopart.com:443/MLZ1608M4R7WT000-TDK-datasheet-136874818.pdf?src-supplier=TME, ComponentLink4URL=https://datasheet.octopart.com:443/MLZ1608M4R7WT000-TDK-datasheet-136874818.pdf?src-supplier=TME, ComponentLink5Description=https://datasheet.octopart.com:443/MLZ1608M4R7WT000-TDK-datasheet-62316133.pdf?src-supplier=Future+Electronics, ComponentLink5URL=https://datasheet.octopart.com:443/MLZ1608M4R7WT000-TDK-datasheet-62316133.pdf?src-supplier=Future+Electronics, Core Material=Ferrite, ESR=650mΩ, Height=800µm, Height - Seated (Max)=939.8µm, Length=1.6mm, Lifecycle Status=Production, Max Current Rating=350mA, Max Length=1.75mm, Max Width=950µm, Min Length=1.45mm, Min Width=650µm, Mounting Technology="Surface Mount", Number of Circuits=1, Number of Terminals=2, Packaging="Tape & Reel (TR)", Pricing="1=0.063, 30=0.058, 50=0.054, 100=0.05 (USD)", REACH SVHC=Yes, RMS Current (Irms)=350mA, RoHS=Compliant, Schedule B="8504500000, 8504500000|8504500000|8504500000|8504500000|8504500000", Shielding=Yes, Stock=50, Supplier=Avnet, Supplier 1=DigiKey, Width=800µm
R1: "1.24 MOhms ±1% 0.125W, 1/8W Chip Resistor 0603 (1608 Metric) Automotive AEC-Q200 Thick Film", Case/Package=0603, Manufacturer=Yageo, Manufacturer Part Number=RC0603JR-075M6L, Max Operating Temperature=155°C, Min Operating Temperature=-55°C, Package Height=0.45mm, Package Length=1.6mm, Package Shape=Rectangular, Package Style=SMTMeter, Package Width=0.8mm, Power=100mW, Rated Temperature=70°C, Resistor Type="FIXED RESISTOR", Supplier Part Number=311-5.6MGRCT-ND, Supplier Part Number 1=541-1.24MHCT-ND, Temperature Coefficient=100ppm/°C, Tolerance=5%, Working Voltage=75V, Additional Feature="LASER TRIMMABLE", Category="Chip SMD Resistors", ComponentLink1Description=https://datasheet.ciiva.com:443/pdfs/VipMasterIC/IC/YAGO/YAGO-S-A0008145938/YAGO-S-A0008145938-1.pdf?src-supplier=IHS+Markit, ComponentLink1URL=https://datasheet.ciiva.com:443/pdfs/VipMasterIC/IC/YAGO/YAGO-S-A0008145938/YAGO-S-A0008145938-1.pdf?src-supplier=IHS+Markit, ComponentLink2Description=https://datasheet.ciiva.com/2453/pyu-r-int-thick-7-2453118.pdf?src-supplier=Digikey, ComponentLink2URL=https://datasheet.ciiva.com/2453/pyu-r-int-thick-7-2453118.pdf?src-supplier=Digikey, ComponentLink3Description=https://datasheet.ciiva.com/2453/pyu-r-int-thick-7-2453119.pdf?src-supplier=Digikey, ComponentLink3URL=https://datasheet.ciiva.com/2453/pyu-r-int-thick-7-2453119.pdf?src-supplier=Digikey, ComponentLink4Description=https://datasheet.ciiva.com/2453/pyu-r-int-thick-7-2453120.pdf?src-supplier=Digikey, ComponentLink4URL=https://datasheet.ciiva.com/2453/pyu-r-int-thick-7-2453120.pdf?src-supplier=Digikey, ComponentLink5Description=http://www.mouser.com/ds/2/447/RC0603-272842.pdf?src-supplier=Mouser, ComponentLink5URL=http://www.mouser.com/ds/2/447/RC0603-272842.pdf?src-supplier=Mouser, ComponentLink6Description=http://www.yageo.com/documents/recent/PYu-RC_Group_51_RoHS_L_2.pdf?src-supplier=Avnet, ComponentLink6URL=http://www.yageo.com/documents/recent/PYu-RC_Group_51_RoHS_L_2.pdf?src-supplier=Avnet, ComponentLink7Description=http://www.yageo.com.tw/exep/pages/download/literatures/PYu-R_INT-thick_7.pdf?src-supplier=Digikey, ComponentLink7URL=http://www.yageo.com.tw/exep/pages/download/literatures/PYu-R_INT-thick_7.pdf?src-supplier=Digikey, Construction=Chip, JESD-609 Code=e3, Mounting Technology="Surface Mount", Packaging="Tape and Reel", Pins=2, Pricing="1=0.1, 10=0.015, 50=0.0092, 100=0.0076, 500=0.00512, 1000=0.00437 (USD)", Reach SVHC Compliant=Yes, RoHS=Yes, RoHS Compliant=Yes, Stock=110556, Supplier=Digikey, Supplier 1=DigiKey, Technology="METAL GLAZE/THICK FILM", Terminal Finish=Nickel, Termination=Wraparound
R2: "Fixed Resistor, Metal Glaze/thick Film, 0.1W, 8200000ohm, 75V, 5% +/-Tol, 100ppm/Cel, Surface Mount, 0603", Case/Package=0603, Manufacturer=Yageo, Manufacturer Part Number=RC0603JR-078M2L, Max Operating Temperature=155°C, Min Operating Temperature=-55°C, Package Height=0.45mm, Package Length=1.6mm, Package Shape=Rectangular, Package Style=SMTMeter, Package Width=0.8mm, Power=100mW, Rated Temperature=70°C, Resistor Type="FIXED RESISTOR", Supplier Part Number=311-8.2MGRCT-ND, Supplier Part Number 1=13-RC0603FR-078M2LCT-ND, Temperature Coefficient=100ppm/°C, Tolerance=5%, Working Voltage=75V, Additional Feature="LASER TRIMMABLE", Category="Chip SMD Resistors", ComponentLink1Description=https://datasheet.ciiva.com:443/pdfs/VipMasterIC/IC/YAGO/YAGO-S-A0008145938/YAGO-S-A0008145938-1.pdf?src-supplier=IHS+Markit, ComponentLink1URL=https://datasheet.ciiva.com:443/pdfs/VipMasterIC/IC/YAGO/YAGO-S-A0008145938/YAGO-S-A0008145938-1.pdf?src-supplier=IHS+Markit, ComponentLink2Description=https://datasheet.ciiva.com/12561/rc0603-272842-12561446.pdf?src-supplier=Mouser, ComponentLink2URL=https://datasheet.ciiva.com/12561/rc0603-272842-12561446.pdf?src-supplier=Mouser, ComponentLink3Description=https://datasheet.ciiva.com/2453/pyu-r-int-thick-7-2453229.pdf?src-supplier=Digikey, ComponentLink3URL=https://datasheet.ciiva.com/2453/pyu-r-int-thick-7-2453229.pdf?src-supplier=Digikey, ComponentLink4Description=https://datasheet.ciiva.com/2453/pyu-r-int-thick-7-2453230.pdf?src-supplier=Digikey, ComponentLink4URL=https://datasheet.ciiva.com/2453/pyu-r-int-thick-7-2453230.pdf?src-supplier=Digikey, ComponentLink5Description=https://datasheet.ciiva.com/2453/pyu-r-int-thick-7-2453231.pdf?src-supplier=Digikey, ComponentLink5URL=https://datasheet.ciiva.com/2453/pyu-r-int-thick-7-2453231.pdf?src-supplier=Digikey, Construction=Chip, JESD-609 Code=e3, Mounting Technology="Surface Mount", Packaging="Tape and Reel", Pins=2, Pricing="1=0.1, 10=0.01, 50=0.0082, 100=0.0061, 500=0.0056, 1000=0.0051 (USD)", Reach SVHC Compliant=Yes, RoHS=Yes, RoHS Compliant=Yes, Stock=33026, Supplier=Digikey, Supplier 1=DigiKey, Technology="METAL GLAZE/THICK FILM", Terminal Finish=Nickel, Termination=Wraparound
R3 R4 R17 R20: "GENERAL PURPOSE CHIP RESISTOR Metal Glaze/thick Film, 0.1W, 0ohm, Surface Mount, 0603", Case Code (Imperial)=0603, Manufacturer="Yageo Group", Manufacturer Part Number=RC0603JR-070RL, Max Operating Temperature=155°C, Min Operating Temperature=-55°C, Power Dissipation=100mW, Supplier Part Number=68X3182, Supplier Part Number 1=RMCF0603ZT0R00TR-ND, Temperature Coefficient=200ppm/°C, Tolerance=1%, Voltage Rating=50V, Case/Package=0603, Category="Chip SMD Resistors", China RoHS=Non-Compliant, ComponentLink1Description=https://datasheet.octopart.com:443/RC0603JR-070RL-Yageo-datasheet-182189538.pdf?src-supplier=IHS, ComponentLink1URL=https://datasheet.octopart.com:443/RC0603JR-070RL-Yageo-datasheet-182189538.pdf?src-supplier=IHS, ComponentLink2Description=https://datasheet.octopart.com:443/RC0603JR-070RL-Yageo-datasheet-8328172.pdf?src-supplier=element14+APAC, ComponentLink2URL=https://datasheet.octopart.com:443/RC0603JR-070RL-Yageo-datasheet-8328172.pdf?src-supplier=element14+APAC, ComponentLink3Description=https://datasheet.octopart.com:443/RC0603JR-070RL-Yageo-datasheet-17842380.pdf?src-supplier=element14+APAC, ComponentLink3URL=https://datasheet.octopart.com:443/RC0603JR-070RL-Yageo-datasheet-17842380.pdf?src-supplier=element14+APAC, ComponentLink4Description=https://datasheet.octopart.com:443/RC0603JR-070RL-Yageo-datasheet-62067350.pdf?src-supplier=Farnell, ComponentLink4URL=https://datasheet.octopart.com:443/RC0603JR-070RL-Yageo-datasheet-62067350.pdf?src-supplier=Farnell, ComponentLink5Description=https://datasheet.octopart.com:443/RC0603JR-070RL-Yageo-datasheet-15599030.pdf?src-supplier=Future+Electronics, ComponentLink5URL=https://datasheet.octopart.com:443/RC0603JR-070RL-Yageo-datasheet-15599030.pdf?src-supplier=Future+Electronics, ComponentLink6Description=https://datasheet.octopart.com:443/RC0603JR-070RL-Yageo-datasheet-164759695.pdf?src-supplier=Future+Electronics, ComponentLink6URL=https://datasheet.octopart.com:443/RC0603JR-070RL-Yageo-datasheet-164759695.pdf?src-supplier=Future+Electronics, ComponentLink7Description=https://datasheet.octopart.com:443/RC0603JR-070RL-Yageo-datasheet-137700087.pdf?src-supplier=Future+Electronics, ComponentLink7URL=https://datasheet.octopart.com:443/RC0603JR-070RL-Yageo-datasheet-137700087.pdf?src-supplier=Future+Electronics, ComponentLink8Description=https://datasheet.octopart.com:443/RC0603JR-070RL-Yageo-datasheet-27584510.pdf?src-supplier=Future+Electronics, ComponentLink8URL=https://datasheet.octopart.com:443/RC0603JR-070RL-Yageo-datasheet-27584510.pdf?src-supplier=Future+Electronics, ComponentLink9Description=https://datasheet.octopart.com:443/RC0603JR-070RL-Yageo-datasheet-503470.pdf?src-supplier=Future+Electronics, ComponentLink9URL=https://datasheet.octopart.com:443/RC0603JR-070RL-Yageo-datasheet-503470.pdf?src-supplier=Future+Electronics, ComponentLink10Description=https://datasheet.octopart.com:443/RC0603JR-070RL-Yageo-datasheet-12596169.pdf?src-supplier=Newark, ComponentLink10URL=https://datasheet.octopart.com:443/RC0603JR-070RL-Yageo-datasheet-12596169.pdf?src-supplier=Newark, ComponentLink11Description=https://datasheet.octopart.com:443/RC0603JR-070RL-Yageo-datasheet-34211833.pdf?src-supplier=Newark, ComponentLink11URL=https://datasheet.octopart.com:443/RC0603JR-070RL-Yageo-datasheet-34211833.pdf?src-supplier=Newark, ComponentLink12Description=https://datasheet.octopart.com:443/RC0603JR-070RL-Yageo-datasheet-79472498.pdf?src-supplier=Megastar, ComponentLink12URL=https://datasheet.octopart.com:443/RC0603JR-070RL-Yageo-datasheet-79472498.pdf?src-supplier=Megastar, ComponentLink13Description=https://datasheet.octopart.com/RC0603JR-070RL-Yageo-datasheet-73766026.pdf, ComponentLink13URL=https://datasheet.octopart.com/RC0603JR-070RL-Yageo-datasheet-73766026.pdf, ComponentLink14Description=https://datasheet.octopart.com:443/RC0603JR-070RL-Yageo-datasheet-5393049.pdf?src-supplier=element14, ComponentLink14URL=https://datasheet.octopart.com:443/RC0603JR-070RL-Yageo-datasheet-5393049.pdf?src-supplier=element14, ComponentLink15Description=https://datasheet.octopart.com:443/RC0603JR-070RL-Yageo-datasheet-118562.pdf?src-supplier=DigiKey, ComponentLink15URL=https://datasheet.octopart.com:443/RC0603JR-070RL-Yageo-datasheet-118562.pdf?src-supplier=DigiKey, ComponentLink16Description=http://sigma.octopart.com:80/rohs_statement/Yageo-company-2.pdf?src-supplier=Compliance+Statements, ComponentLink16URL=http://sigma.octopart.com:80/rohs_statement/Yageo-company-2.pdf?src-supplier=Compliance+Statements, ComponentLink17Description=http://sigma.octopart.com:80/conflict_mineral_statement/Yageo-company-3.pdf?src-supplier=Compliance+Statements, ComponentLink17URL=http://sigma.octopart.com:80/conflict_mineral_statement/Yageo-company-3.pdf?src-supplier=Compliance+Statements, Composition="Thick Film", Contact Plating=Tin, Depth=800µm, Height=450µm, Lead Free="Lead Free", Length=1.6mm, Lifecycle Status=Production, Military Standard=Not, Mounting Technology="Surface Mount", Number of Terminals=2, Packaging="Cut Tape", Pins=2, Power Rating=100mW, Pricing="5000=0.003 (USD)", Radiation Hardening=No, REACH SVHC=Yes, RoHS=Compliant, Stock=1605000, Supplier=Newark, Supplier 1=DigiKey, Termination=SMD/SMT, Voltage Rating (DC)=50V, Width=800µm
R5 R6: "Fixed Resistor, Metal Glaze/thick Film, 0.1W, 5100ohm, 75V, 1% +/-Tol, 100ppm/Cel, Surface Mount, 0603", Case/Package=0603, Manufacturer=Yageo, Manufacturer Part Number=RC0603FR-075K1L, Max Operating Temperature=155°C, Min Operating Temperature=-55°C, Package Height=0.45mm, Package Length=1.6mm, Package Shape=Rectangular, Package Style=SMTMeter, Package Width=0.8mm, Power=100mW, Rated Temperature=70°C, Resistor Type="FIXED RESISTOR", Supplier Part Number=311-5.10KHRCT-ND, Temperature Coefficient=100ppm/°C, Tolerance=1%, Working Voltage=75V, Additional Feature="LASER TRIMMABLE", Category="Chip SMD Resistors", ComponentLink1Description=https://datasheet.ciiva.com:443/pdfs/VipMasterIC/IC/YAGO/YAGO-S-A0008145938/YAGO-S-A0008145938-1.pdf?src-supplier=IHS+Markit, ComponentLink1URL=https://datasheet.ciiva.com:443/pdfs/VipMasterIC/IC/YAGO/YAGO-S-A0008145938/YAGO-S-A0008145938-1.pdf?src-supplier=IHS+Markit, ComponentLink2Description=https://datasheet.ciiva.com/46395/443971-46395016.pdf?src-supplier=Element14, ComponentLink2URL=https://datasheet.ciiva.com/46395/443971-46395016.pdf?src-supplier=Element14, ComponentLink3Description=https://datasheet.ciiva.com/2454/pyu-r-int-thick-7-2454045.pdf?src-supplier=Digikey, ComponentLink3URL=https://datasheet.ciiva.com/2454/pyu-r-int-thick-7-2454045.pdf?src-supplier=Digikey, ComponentLink4Description=https://datasheet.ciiva.com/2454/pyu-r-int-thick-7-2454046.pdf?src-supplier=Digikey, ComponentLink4URL=https://datasheet.ciiva.com/2454/pyu-r-int-thick-7-2454046.pdf?src-supplier=Digikey, ComponentLink5Description=https://datasheet.ciiva.com/2454/pyu-r-int-thick-7-2454047.pdf?src-supplier=Digikey, ComponentLink5URL=https://datasheet.ciiva.com/2454/pyu-r-int-thick-7-2454047.pdf?src-supplier=Digikey, ComponentLink6Description=https://datasheet.ciiva.com/15189/getdatasheetpartid-326732-15189786.pdf?src-supplier=Verical, ComponentLink6URL=https://datasheet.ciiva.com/15189/getdatasheetpartid-326732-15189786.pdf?src-supplier=Verical, Construction=Chip, JESD-609 Code=e3, Mounting Technology="Surface Mount", Packaging="Tape and Reel", Pins=2, Pricing="1=0.1, 10=0.019, 50=0.0112, 100=0.0093, 500=0.00622, 1000=0.00532, 5000=0.00382, 10000=0.00335, 25000=0.00287, 35000=0.00278, 50000=0.00257, 125000=0.00232 (USD)", Reach SVHC Compliant=Yes, RoHS=Yes, RoHS Compliant=Yes, Stock=2084844, Supplier=Digikey, Supplier 1=DigiKey, Supplier Part Number 1=311-5.10KHRCT-ND, Technology="METAL GLAZE/THICK FILM", Terminal Finish=Nickel, Termination=Wraparound
R7: "Fixed Resistor, Metal Glaze/thick Film, 0.1W, 7320000ohm, 75V, 1% +/-Tol, 100ppm/Cel, Surface Mount, 0603", Case/Package=0402, Manufacturer=Yageo, Manufacturer Part Number=RC0402FR-077M32L, Max Operating Temperature=155°C, Min Operating Temperature=-55°C, Package Height=0.35mm, Package Length=1mm, Package Shape=Rectangular, Package Style=SMTMeter, Package Width=0.5mm, Power=62.5mW, Rated Temperature=70°C, Resistor Type="FIXED RESISTOR", Supplier Part Number=13-RC0402FR-077M32LCT-ND, Temperature Coefficient=100ppm/°C, Tolerance=1%, Working Voltage=50V, Additional Feature="LASER TRIMMABLE", Category="Chip SMD Resistors", ComponentLink1Description=https://datasheet.ciiva.com:443/pdfs/VipMasterIC/IC/YAGO/YAGO-S-A0008145938/YAGO-S-A0008145938-1.pdf?src-supplier=IHS+Markit, ComponentLink1URL=https://datasheet.ciiva.com:443/pdfs/VipMasterIC/IC/YAGO/YAGO-S-A0008145938/YAGO-S-A0008145938-1.pdf?src-supplier=IHS+Markit, ComponentLink2Description=http://www.mouser.com/ds/2/447/PYu-RC0402_51_RoHS_L_6_r-8721.pdf?src-supplier=Mouser, ComponentLink2URL=http://www.mouser.com/ds/2/447/PYu-RC0402_51_RoHS_L_6_r-8721.pdf?src-supplier=Mouser, ComponentLink3Description=http://www.yageo.com.tw/exep/pages/download/literatures/PYu-R_INT-thick_7.pdf?src-supplier=Digikey, ComponentLink3URL=http://www.yageo.com.tw/exep/pages/download/literatures/PYu-R_INT-thick_7.pdf?src-supplier=Digikey, ComponentLink4Description=http://www.yageo.com/documents/recent/PYu-RC0402_51_RoHS_L_6.pdf?src-supplier=Avnet, ComponentLink4URL=http://www.yageo.com/documents/recent/PYu-RC0402_51_RoHS_L_6.pdf?src-supplier=Avnet, ComponentLink5Description=https://datasheet.octopart.com/RC0402FR-077M32L-Yageo-datasheet-164759695.pdf?src-supplier=Future+Electronics, ComponentLink5URL=https://datasheet.octopart.com/RC0402FR-077M32L-Yageo-datasheet-164759695.pdf?src-supplier=Future+Electronics, ComponentLink6Description=https://datasheet.ciiva.com:443/pdfs/VipMasterIC/IC/VISH/VISH-S-A0007266705/VISH-S-A0007266705-1.pdf?src-supplier=IHS+Markit, ComponentLink6URL=https://datasheet.ciiva.com:443/pdfs/VipMasterIC/IC/VISH/VISH-S-A0007266705/VISH-S-A0007266705-1.pdf?src-supplier=IHS+Markit, ComponentLink7Description=https://datasheet.ciiva.com/22676/1700796-22676479.pdf?src-supplier=Element14, ComponentLink7URL=https://datasheet.ciiva.com/22676/1700796-22676479.pdf?src-supplier=Element14, ComponentLink8Description=https://datasheet.ciiva.com/5588/dcrcwe3-109170-5588998.pdf?src-supplier=Mouser, ComponentLink8URL=https://datasheet.ciiva.com/5588/dcrcwe3-109170-5588998.pdf?src-supplier=Mouser, ComponentLink9Description=https://datasheet.ciiva.com/2525/dcrcwe3-2525464.pdf?src-supplier=Digikey, ComponentLink9URL=https://datasheet.ciiva.com/2525/dcrcwe3-2525464.pdf?src-supplier=Digikey, ComponentLink10Description=https://datasheet.ciiva.com/2525/dcrcwe3-2525465.pdf?src-supplier=Digikey, ComponentLink10URL=https://datasheet.ciiva.com/2525/dcrcwe3-2525465.pdf?src-supplier=Digikey, ComponentLink11Description=https://datasheet.ciiva.com/2525/dcrcwe3-2525466.pdf?src-supplier=Digikey, ComponentLink11URL=https://datasheet.ciiva.com/2525/dcrcwe3-2525466.pdf?src-supplier=Digikey, Construction=Chip, JESD-609 Code=e3, Mounting Technology="Surface Mount", Packaging="Tape and Reel", Pins=2, Pricing="1=0.1, 10=0.015, 50=0.0088, 100=0.0073, 500=0.00488, 1000=0.00417, 5000=0.00297 (USD)", Reach SVHC Compliant=Yes, Reference Standard=AEC-Q200, RoHS=Yes, RoHS Compliant=Yes, Stock=49586, Supplier=Digikey, Supplier 1=DigiKey, Supplier Part Number 1=13-RC0402FR-077M32LCT-ND, Technology="METAL GLAZE/THICK FILM", Terminal Finish=Nickel, Termination=Wraparound